# EAGLE board maple-protoshield-v0.1 (EAGLE 5.10)
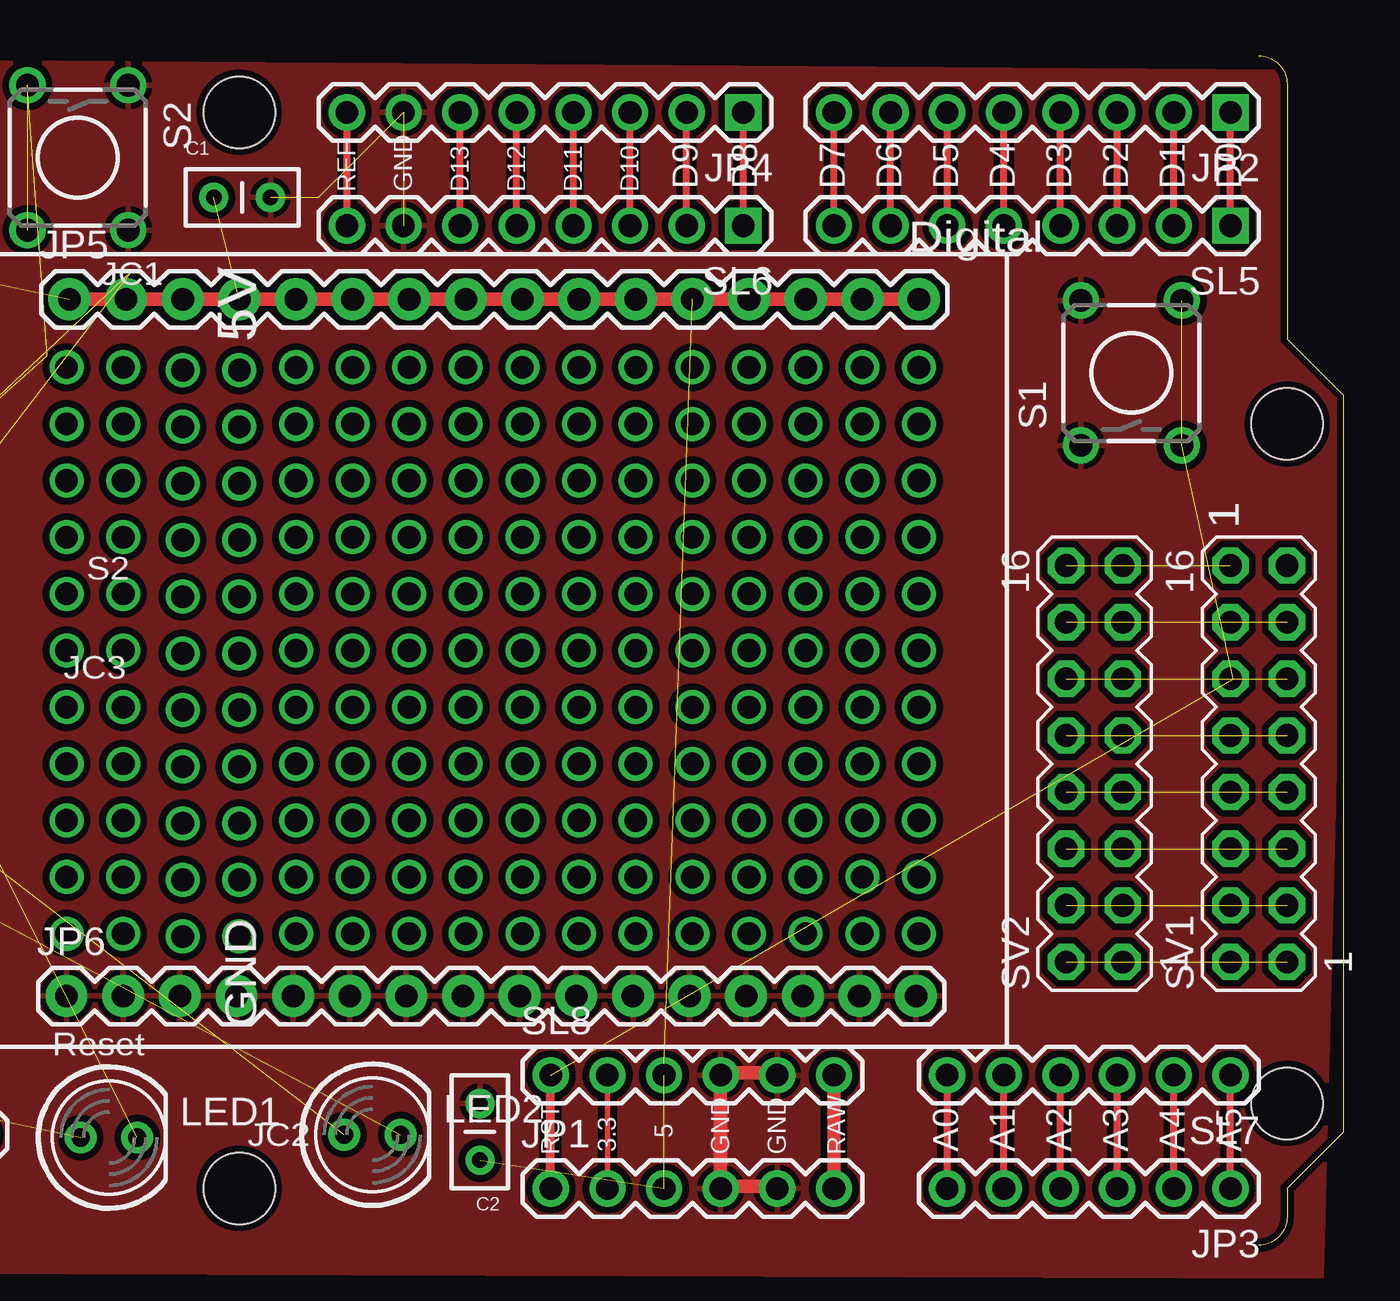
[diagram p0: board, top side]
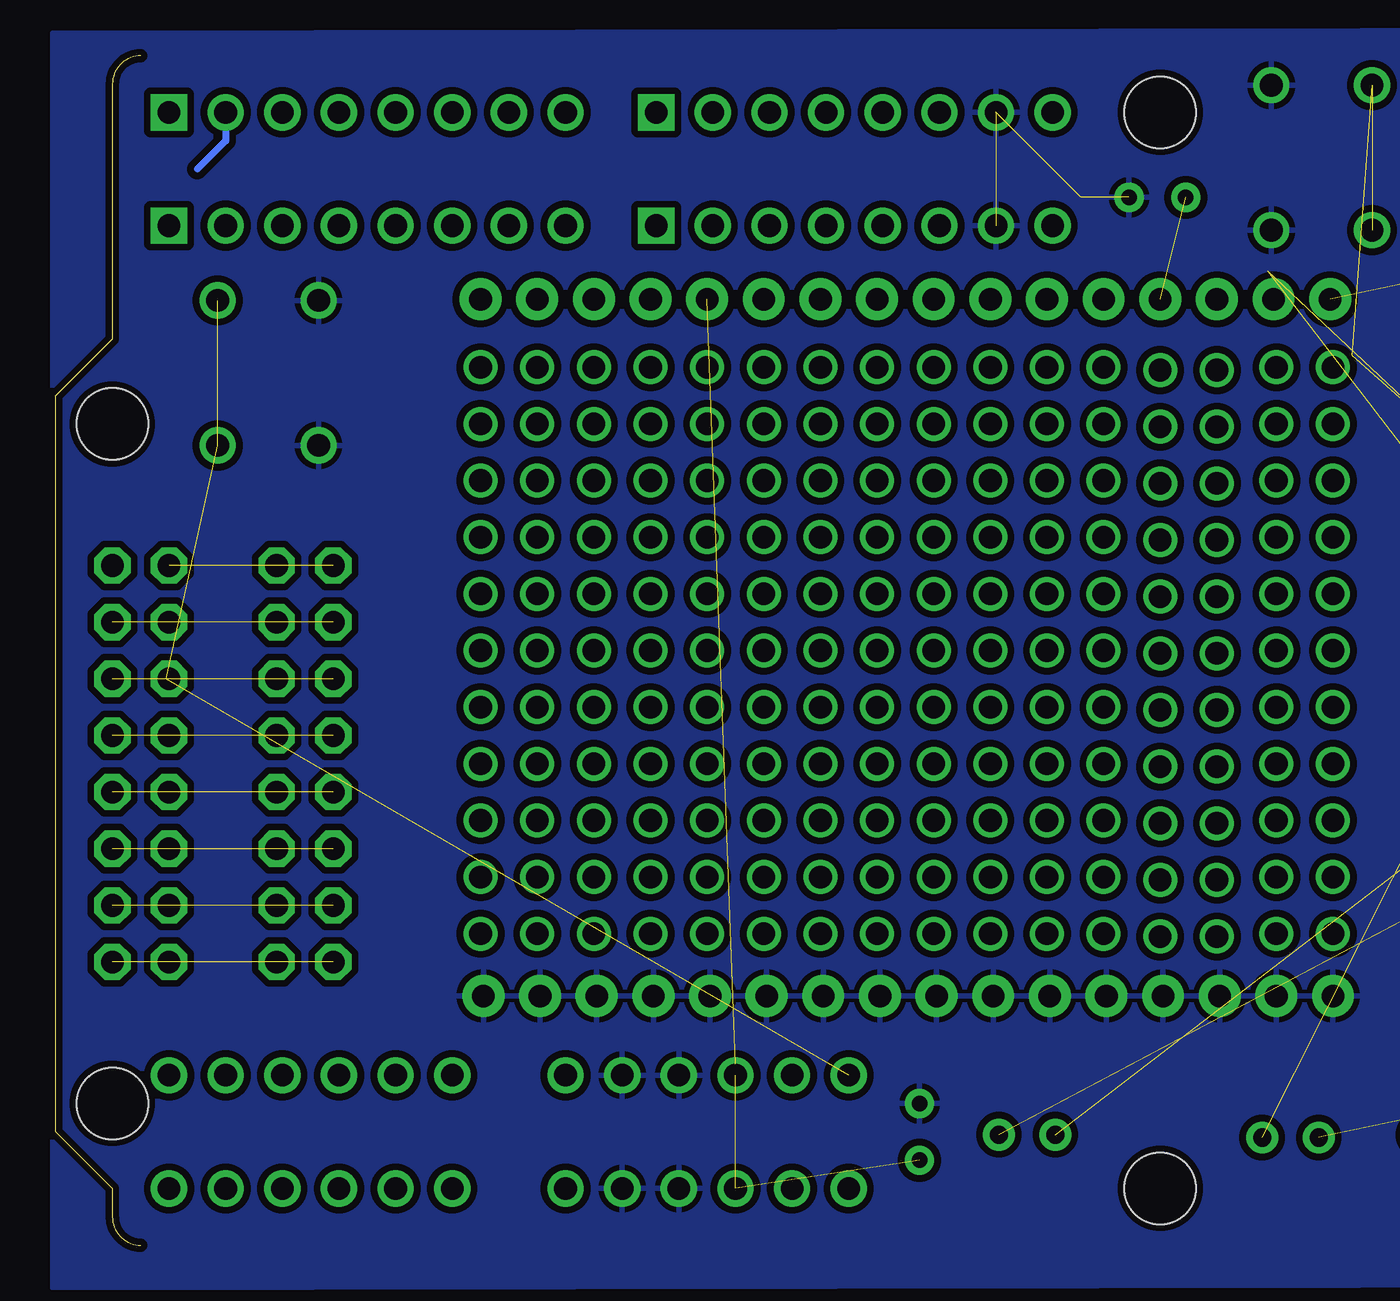
[diagram p1: board, bottom side, seen from below]

Size 3.81 x 53.34 mm. Coordinates in mm from the lower left corner, seen from the top.
Outline: 0,53.34 arc-90 1.27,52.07 1.27,40.64 3.81,38.1 3.81,5.08 1.27,2.54 1.27,1.27 arc-90 0,0
Copper layers (1*16): Top 0.035mm / dielectric 1.5mm / Bottom 0.035mm
Design rules "SparkFun": minimum track width 8mil, minimum drill 20mil, track to track 8mil, track to pad 8mil, pad to pad 8mil, via to via 8mil, smd to smd 8mil, copper to edge 10mil, drill to drill 8mil, minimum pad ring 12mil, minimum via ring 10mil, stop-mask expansion 4mil, vias tented up to drill 20mil, thermal gap 10mil
Net classes: 1 power: width 0.254 mm
Holes 3.2 mm at 1.27,6.35 -45.72,50.8 1.27,36.83 -45.72,2.54

## Footprints (pad centres in the part's own frame; a part is rotated, then mirrored left to right if it is on the bottom)
CAP-PTH-SMALL2 = drill 0.7 round: 1 0,0; 2 2.54,0
1X01 = drill 1.016 round: 1 0,0
1X06 = drill 1.016 round: 1 0,0; 2 2.54,0; 3 5.08,0; 4 7.62,0; 5 10.16,0; 6 12.7,0
1X08 = drill 1.016 square: 1 0,0 | drill 1.016 round: 2 2.54,0; 3 5.08,0; 4 7.62,0; 5 10.16,0; 6 12.7,0; 7 15.24,0; 8 17.78,0
1X16 = drill 1.016 pad 1.88 round: 1 0,0; 2 2.54,0; 3 5.08,0; 4 7.62,0; 5 10.16,0; 6 12.7,0; 7 15.24,0; 8 17.78,0; 9 20.32,0; 10 22.86,0; 11 25.4,0; 12 27.94,0; 13 30.48,0; 14 33.02,0; 15 35.56,0; 16 38.1,0
LED5MM = drill 0.813 round: A -1.27,0; K 1.27,0
AXIAL-0.3 = drill 0.9 round: P$1 -3.81,0; P$2 3.81,0
TACTILE-PTH = drill 1.016 round: 1 -3.251,2.261; 2 3.251,2.261; 3 -3.251,-2.261; 4 3.251,-2.261
MA08-2 = drill 1.016 octagon: 1 -8.89,-1.27; 2 -8.89,1.27; 3 -6.35,-1.27; 4 -6.35,1.27; 5 -3.81,-1.27; 6 -3.81,1.27; 7 -1.27,-1.27; 8 -1.27,1.27; 9 1.27,-1.27; 10 1.27,1.27; 11 3.81,-1.27; 12 3.81,1.27; 13 6.35,-1.27; 14 6.35,1.27; 15 8.89,-1.27; 16 8.89,1.27

## Placement (x,y rotation side)
BB1  BREADBOARDMINI  [BREADBOARD-MINI]  -57.02,8.89 0 top  (outside the outline)
C1  0.1uF  [CAP-PTH-SMALL2]  -46.86,46.99 0 top  (outside the outline)
C2  0.1uF  [CAP-PTH-SMALL2]  -34.93,3.81 90 top  (outside the outline)
JC1  M01PTH  [1X01]  -58.93,32.77 0 top  (outside the outline)
JC2  M01PTH  [1X01]  -57.4,4.95 180 top  (outside the outline)
JC3  M01PTH  [1X01]  -59.06,18.8 270 top  (outside the outline)
JP1  Power  [1X06]  -31.75,2.54 0 top  (outside the outline)
JP2  Digital1  [1X08]  -1.27,50.8 180 top
JP3  Analog  [1X06]  -1.27,2.54 180 top
JP4  Digital2  [1X08]  -23.11,50.8 180 top  (outside the outline)
JP5  M16PTH  [1X16]  -53.34,42.42 0 top  (outside the outline)
JP6  M16PTH  [1X16]  -53.47,11.18 0 top  (outside the outline)
LED1  [LED5MM]  -51.56,4.83 0 top  (outside the outline)
LED2  [LED5MM]  -39.75,4.95 0 top  (outside the outline)
R1  330  [AXIAL-0.3]  -59.06,26.04 270 top  (outside the outline)
R2  330  [AXIAL-0.3]  -59.06,12.06 90 top  (outside the outline)
R4  10K  [AXIAL-0.3]  -58.8,39.75 90 top  (outside the outline)
S1  Reset  [TACTILE-PTH]  -5.72,39.12 90 top  (outside the outline)
S2  [TACTILE-PTH]  -52.96,48.77 270 top  (outside the outline)
SL5  [1X08]  -1.27,45.72 180 top
SL6  [1X08]  -23.11,45.72 180 top  (outside the outline)
SL7  [1X06]  -1.27,7.62 180 top
SL8  [1X06]  -31.75,7.62 0 top  (outside the outline)
SV1  [MA08-2]  0,21.59 90 top
SV2  [MA08-2]  -7.37,21.59 90 top  (outside the outline)
U$2  CREATIVE_COMMONS  [CREATIVE_COMMONS]  -73.79,-35.56 0 top  (outside the outline)

## Library data of the parts
BB1 C1 C2 JC1-JC3 JP1-JP6 LED1 LED2 R1 R2 R4 S1 S2 SL5-SL8 U$2 = SparkFun
SV1 SV2 = con-lstb

## Nets
3.3V: JP1.2 SL8.2
5V [power]: C1.1 C2.1 JP1.3 JP5.1 JP5.2 JP5.3 JP5.4 JP5.5 JP5.6 JP5.7 JP5.8 JP5.9 JP5.10 JP5.11 JP5.12 JP5.13 JP5.14 JP5.15 JP5.16 R4.P$2 SL8.3
A0: JP3.6 SL7.6
A1: JP3.5 SL7.5
A2: JP3.4 SL7.4
A3: JP3.3 SL7.3
A4: JP3.2 SL7.2
A5: JP3.1 SL7.1
AREF: JP4.8 SL6.8
D2: JP2.3 SL5.3
D3: JP2.4 SL5.4
D4: JP2.5 SL5.5
D5: JP2.6 SL5.6
D6: JP2.7 SL5.7
D7: JP2.8 SL5.8
D8: JP4.1 SL6.1
D9: JP4.2 SL6.2
D10: JP4.3 SL6.3
D11: JP4.4 SL6.4
D12: JP4.5 SL6.5
D13: JP4.6 SL6.6
GND [power]: C1.2 C2.2 JP1.4 JP1.5 JP4.7 JP6.1 JP6.2 JP6.3 JP6.4 JP6.5 JP6.6 JP6.7 JP6.8 JP6.9 JP6.10 JP6.11 JP6.12 JP6.13 JP6.14 JP6.15 JP6.16 R1.P$1 R2.P$1 S1.1 S1.2 S2.1 S2.2 SL6.7 SL8.4 SL8.5
N$2: JC1.1 R4.P$1 S2.3 S2.4
N$6: LED1.K R1.P$2
N$7: LED2.K R2.P$2
N$8: JC2.1 LED1.A
N$9: JC3.1 LED2.A
N$39: SV1.1 SV2.1
N$183: SV1.3 SV2.3
N$184: SV1.5 SV2.5
N$185: SV1.7 SV2.7
N$186: SV1.9 SV2.9
N$187: SV1.11 SV2.11
N$188: SV1.13 SV2.13
N$189: SV1.15
N$190: SV1.2 SV2.2
N$191: SV1.4 SV2.4
N$192: SV1.6 SV2.6
N$193: SV1.8 SV2.8
N$194: SV1.10 SV2.10
N$195: SV1.12 SV2.12
N$196: SV1.14 SV2.14
N$197: SV1.16 SV2.16
RESET: JP1.1 S1.3 S1.4 SL8.1
RX: JP2.1 SL5.1
TX: JP2.2 SL5.2
VIN [power]: JP1.6 SL8.6

## Tracks (layer width: path | path; a pad name or v marks a point on that pad's centre or on a via)
3.3V
  Top 0.254: JP1.2 SL8.2
5V  (5 unrouted)
  Top 0.61: JP5.1 JP5.2 JP5.3 JP5.4 JP5.5 JP5.6 JP5.7 JP5.8 JP5.9 JP5.10 JP5.11 JP5.12 JP5.13 JP5.14 JP5.15 JP5.16
  Bottom 0.61: SL8.3 -26.67,8.13
A0
  Top 0.305: JP3.6 SL7.6
A1
  Top 0.305: JP3.5 SL7.5
A2
  Top 0.305: JP3.4 SL7.4
A3
  Top 0.305: JP3.3 SL7.3
A4
  Top 0.305: JP3.2 SL7.2
A5
  Top 0.305: JP3.1 SL7.1
AREF
  Top 0.305: SL6.8 JP4.8
D2
  Top 0.305: SL5.3 JP2.3
D3
  Top 0.305: SL5.4 JP2.4
D4
  Top 0.305: SL5.5 JP2.5
D5
  Top 0.305: SL5.6 JP2.6
D6
  Top 0.305: SL5.7 JP2.7
D7
  Top 0.305: SL5.8 JP2.8
D8
  Top 0.305: SL6.1 JP4.1
D9
  Top 0.305: SL6.2 JP4.2
D10
  Top 0.305: SL6.3 JP4.3
D11
  Top 0.305: SL6.4 JP4.4
D12
  Top 0.305: SL6.5 JP4.5
D13
  Top 0.305: SL6.6 JP4.6
GND  (3 unrouted)
  Top 0.61: JP1.5 -22.3,2.64 -23.52,2.64 JP1.4 SL8.4 -23.52,7.72 -22.3,7.72 SL8.5
  pour Bottom (isolate 0.305): 3.94,54.36 3.94,-1.91 -66.42,-1.78 -66.42,54.48
  pour Top (isolate 0.305): 4.19,52.58 2.79,-1.4 -65.91,-1.14 -65.91,53.09
N$1  (via drill 1.02)
  other vias: -48.26,39.24
N$2  (5 unrouted)
N$3  (via drill 1.02)
  other vias: -48.26,36.7
N$4  (via drill 1.02)
  other vias: -48.26,13.84
N$5  (via drill 1.02)
  other vias: -48.26,16.38
N$6  (1 unrouted)
N$7  (1 unrouted)
N$8  (2 unrouted)
N$9  (1 unrouted)
N$10  (via drill 1.02)
  other vias: -48.26,18.92
N$11  (via drill 1.02)
  other vias: -48.26,21.46
N$12  (via drill 1.02)
  other vias: -48.26,24
N$13  (via drill 1.02)
  other vias: -48.26,26.54
N$14  (via drill 1.02)
  other vias: -48.26,29.08
N$15  (via drill 1.02)
  other vias: -48.26,31.62
N$16  (via drill 1.02)
  other vias: -48.26,34.16
N$17  (via drill 1.02)
  other vias: -50.93,39.37
N$18  (via drill 1.02)
  other vias: -50.93,36.83
N$19  (via drill 1.02)
  other vias: -50.93,13.97
N$20  (via drill 1.02)
  other vias: -50.93,16.51
N$21  (via drill 1.02)
  other vias: -50.93,19.05
N$22  (via drill 1.02)
  other vias: -50.93,21.59
N$23  (via drill 1.02)
  other vias: -50.93,24.13
N$24  (via drill 1.02)
  other vias: -50.93,26.67
N$25  (via drill 1.02)
  other vias: -50.93,29.21
N$26  (via drill 1.02)
  other vias: -50.93,31.75
N$27  (via drill 1.02)
  other vias: -50.93,34.29
N$28  (via drill 1.02)
  other vias: -53.47,39.37
N$29  (via drill 1.02)
  other vias: -53.47,36.83
N$30  (via drill 1.02)
  other vias: -53.47,13.97
N$31  (via drill 1.02)
  other vias: -53.47,16.51
N$32  (via drill 1.02)
  other vias: -53.47,19.05
N$33  (via drill 1.02)
  other vias: -53.47,21.59
N$34  (via drill 1.02)
  other vias: -53.47,24.13
N$35  (via drill 1.02)
  other vias: -53.47,26.67
N$36  (via drill 1.02)
  other vias: -53.47,29.21
N$37  (via drill 1.02)
  other vias: -53.47,31.75
N$38  (via drill 1.02)
  other vias: -53.47,34.29
N$39  (1 unrouted)
N$40  (via drill 1.02)
  other vias: -45.72,39.24
N$41  (via drill 1.02)
  other vias: -45.72,36.7
N$42  (via drill 1.02)
  other vias: -45.72,13.84
N$43  (via drill 1.02)
  other vias: -45.72,16.38
N$44  (via drill 1.02)
  other vias: -45.72,18.92
N$45  (via drill 1.02)
  other vias: -45.72,21.46
N$46  (via drill 1.02)
  other vias: -45.72,24
N$47  (via drill 1.02)
  other vias: -45.72,26.54
N$48  (via drill 1.02)
  other vias: -45.72,29.08
N$49  (via drill 1.02)
  other vias: -45.72,31.62
N$50  (via drill 1.02)
  other vias: -45.72,34.16
N$51  (via drill 1.02)
  other vias: -15.24,39.37
N$52  (via drill 1.02)
  other vias: -15.24,36.83
N$53  (via drill 1.02)
  other vias: -15.24,13.97
N$54  (via drill 1.02)
  other vias: -15.24,16.51
N$55  (via drill 1.02)
  other vias: -15.24,19.05
N$56  (via drill 1.02)
  other vias: -15.24,21.59
N$57  (via drill 1.02)
  other vias: -15.24,24.13
N$58  (via drill 1.02)
  other vias: -15.24,26.67
N$59  (via drill 1.02)
  other vias: -15.24,29.21
N$60  (via drill 1.02)
  other vias: -15.24,31.75
N$61  (via drill 1.02)
  other vias: -15.24,34.29
N$62  (via drill 1.02)
  other vias: -17.78,39.37
N$63  (via drill 1.02)
  other vias: -17.78,36.83
N$64  (via drill 1.02)
  other vias: -17.78,13.97
N$65  (via drill 1.02)
  other vias: -17.78,16.51
N$66  (via drill 1.02)
  other vias: -17.78,19.05
N$67  (via drill 1.02)
  other vias: -17.78,21.59
N$68  (via drill 1.02)
  other vias: -17.78,24.13
N$69  (via drill 1.02)
  other vias: -17.78,26.67
N$70  (via drill 1.02)
  other vias: -17.78,29.21
N$71  (via drill 1.02)
  other vias: -17.78,31.75
N$72  (via drill 1.02)
  other vias: -17.78,34.29
N$73  (via drill 1.02)
  other vias: -20.32,39.37
N$74  (via drill 1.02)
  other vias: -20.32,36.83
N$75  (via drill 1.02)
  other vias: -20.32,13.97
N$76  (via drill 1.02)
  other vias: -20.32,16.51
N$77  (via drill 1.02)
  other vias: -20.32,19.05
N$78  (via drill 1.02)
  other vias: -20.32,21.59
N$79  (via drill 1.02)
  other vias: -20.32,24.13
N$80  (via drill 1.02)
  other vias: -20.32,26.67
N$81  (via drill 1.02)
  other vias: -20.32,29.21
N$82  (via drill 1.02)
  other vias: -20.32,31.75
N$83  (via drill 1.02)
  other vias: -20.32,34.29
N$84  (via drill 1.02)
  other vias: -22.86,39.37
N$85  (via drill 1.02)
  other vias: -22.86,36.83
N$86  (via drill 1.02)
  other vias: -22.86,13.97
N$87  (via drill 1.02)
  other vias: -22.86,16.51
N$88  (via drill 1.02)
  other vias: -22.86,19.05
N$89  (via drill 1.02)
  other vias: -22.86,21.59
N$90  (via drill 1.02)
  other vias: -22.86,24.13
N$91  (via drill 1.02)
  other vias: -22.86,26.67
N$92  (via drill 1.02)
  other vias: -22.86,29.21
N$93  (via drill 1.02)
  other vias: -22.86,31.75
N$94  (via drill 1.02)
  other vias: -22.86,34.29
N$95  (via drill 1.02)
  other vias: -25.4,39.37
N$96  (via drill 1.02)
  other vias: -25.4,36.83
N$97  (via drill 1.02)
  other vias: -25.4,13.97
N$98  (via drill 1.02)
  other vias: -25.4,16.51
N$99  (via drill 1.02)
  other vias: -25.4,19.05
N$100  (via drill 1.02)
  other vias: -25.4,21.59
N$101  (via drill 1.02)
  other vias: -25.4,24.13
N$102  (via drill 1.02)
  other vias: -25.4,26.67
N$103  (via drill 1.02)
  other vias: -25.4,29.21
N$104  (via drill 1.02)
  other vias: -25.4,31.75
N$105  (via drill 1.02)
  other vias: -25.4,34.29
N$106  (via drill 1.02)
  other vias: -27.94,39.37
N$107  (via drill 1.02)
  other vias: -27.94,36.83
N$108  (via drill 1.02)
  other vias: -27.94,13.97
N$109  (via drill 1.02)
  other vias: -27.94,16.51
N$110  (via drill 1.02)
  other vias: -27.94,19.05
N$111  (via drill 1.02)
  other vias: -27.94,21.59
N$112  (via drill 1.02)
  other vias: -27.94,24.13
N$113  (via drill 1.02)
  other vias: -27.94,26.67
N$114  (via drill 1.02)
  other vias: -27.94,29.21
N$115  (via drill 1.02)
  other vias: -27.94,31.75
N$116  (via drill 1.02)
  other vias: -27.94,34.29
N$117  (via drill 1.02)
  other vias: -30.48,39.37
N$118  (via drill 1.02)
  other vias: -30.48,36.83
N$119  (via drill 1.02)
  other vias: -30.48,13.97
N$120  (via drill 1.02)
  other vias: -30.48,16.51
N$121  (via drill 1.02)
  other vias: -30.48,19.05
N$122  (via drill 1.02)
  other vias: -30.48,21.59
N$123  (via drill 1.02)
  other vias: -30.48,24.13
N$124  (via drill 1.02)
  other vias: -30.48,26.67
N$125  (via drill 1.02)
  other vias: -30.48,29.21
N$126  (via drill 1.02)
  other vias: -30.48,31.75
N$127  (via drill 1.02)
  other vias: -30.48,34.29
N$128  (via drill 1.02)
  other vias: -33.02,39.37
N$129  (via drill 1.02)
  other vias: -33.02,36.83
N$130  (via drill 1.02)
  other vias: -33.02,13.97
N$131  (via drill 1.02)
  other vias: -33.02,16.51
N$132  (via drill 1.02)
  other vias: -33.02,19.05
N$133  (via drill 1.02)
  other vias: -33.02,21.59
N$134  (via drill 1.02)
  other vias: -33.02,24.13
N$135  (via drill 1.02)
  other vias: -33.02,26.67
N$136  (via drill 1.02)
  other vias: -33.02,29.21
N$137  (via drill 1.02)
  other vias: -33.02,31.75
N$138  (via drill 1.02)
  other vias: -33.02,34.29
N$139  (via drill 1.02)
  other vias: -35.56,39.37
N$140  (via drill 1.02)
  other vias: -35.56,36.83
N$141  (via drill 1.02)
  other vias: -35.56,13.97
N$142  (via drill 1.02)
  other vias: -35.56,16.51
N$143  (via drill 1.02)
  other vias: -35.56,19.05
N$144  (via drill 1.02)
  other vias: -35.56,21.59
N$145  (via drill 1.02)
  other vias: -35.56,24.13
N$146  (via drill 1.02)
  other vias: -35.56,26.67
N$147  (via drill 1.02)
  other vias: -35.56,29.21
N$148  (via drill 1.02)
  other vias: -35.56,31.75
N$149  (via drill 1.02)
  other vias: -35.56,34.29
N$150  (via drill 1.02)
  other vias: -38.1,39.37
N$151  (via drill 1.02)
  other vias: -38.1,36.83
N$152  (via drill 1.02)
  other vias: -38.1,13.97
N$153  (via drill 1.02)
  other vias: -38.1,16.51
N$154  (via drill 1.02)
  other vias: -38.1,19.05
N$155  (via drill 1.02)
  other vias: -38.1,21.59
N$156  (via drill 1.02)
  other vias: -38.1,24.13
N$157  (via drill 1.02)
  other vias: -38.1,26.67
N$158  (via drill 1.02)
  other vias: -38.1,29.21
N$159  (via drill 1.02)
  other vias: -38.1,31.75
N$160  (via drill 1.02)
  other vias: -38.1,34.29
N$161  (via drill 1.02)
  other vias: -40.64,39.37
N$162  (via drill 1.02)
  other vias: -40.64,36.83
N$163  (via drill 1.02)
  other vias: -40.64,13.97
N$164  (via drill 1.02)
  other vias: -40.64,16.51
N$165  (via drill 1.02)
  other vias: -40.64,19.05
N$166  (via drill 1.02)
  other vias: -40.64,21.59
N$167  (via drill 1.02)
  other vias: -40.64,24.13
N$168  (via drill 1.02)
  other vias: -40.64,26.67
N$169  (via drill 1.02)
  other vias: -40.64,29.21
N$170  (via drill 1.02)
  other vias: -40.64,31.75
N$171  (via drill 1.02)
  other vias: -40.64,34.29
N$172  (via drill 1.02)
  other vias: -43.18,39.37
N$173  (via drill 1.02)
  other vias: -43.18,36.83
N$174  (via drill 1.02)
  other vias: -43.18,13.97
N$175  (via drill 1.02)
  other vias: -43.18,16.51
N$176  (via drill 1.02)
  other vias: -43.18,19.05
N$177  (via drill 1.02)
  other vias: -43.18,21.59
N$178  (via drill 1.02)
  other vias: -43.18,24.13
N$179  (via drill 1.02)
  other vias: -43.18,26.67
N$180  (via drill 1.02)
  other vias: -43.18,29.21
N$181  (via drill 1.02)
  other vias: -43.18,31.75
N$182  (via drill 1.02)
  other vias: -43.18,34.29
N$183  (1 unrouted)
N$184  (1 unrouted)
N$185  (1 unrouted)
N$186  (1 unrouted)
N$187  (1 unrouted)
N$188  (1 unrouted)
N$190  (1 unrouted)
N$191  (1 unrouted)
N$192  (1 unrouted)
N$193  (1 unrouted)
N$194  (1 unrouted)
N$195  (1 unrouted)
N$196  (1 unrouted)
N$197  (1 unrouted)
RESET  (3 unrouted)
  Top 0.406: -1.14,25.4 -1.13,25.39 | JP1.1 SL8.1
RX
  Top 0.305: SL5.1 JP2.1
TX
  Top 0.305: SL5.2 JP2.2
  Bottom 0.305: -2.54,48.26 -3.81,49.53 JP2.2
VIN
  Top 0.61: JP1.6 SL8.6

## Text on the board
tPlace: D9 | D8 | D7 | D6 | D5 | D4 | D3 | D2 | D1 | D0 | REF | GND | D13 | D12 | D11 | D10 | JC1 | 5V | 1 | S2 | JC3 | GND | Reset | JC2 | 5 | RST | 3.3 | GND | GND | RAW | A0 | A1 | A2 | A3 | A4 | A5
tNames: Digital